# Altium PCB PCI short card universal - 32 BIT.PCBDOC (part 3 of 4)
Units mm, origin at the board's own origin, x right, y up, seen from the top; angles counter-clockwise.
Board outline 174.62 x 106.68 mm, 4 copper layers (TopLayer, MidLayer2, MidLayer3, BottomLayer); 200 components, 306 nets, 1120 pads, 510 vias.
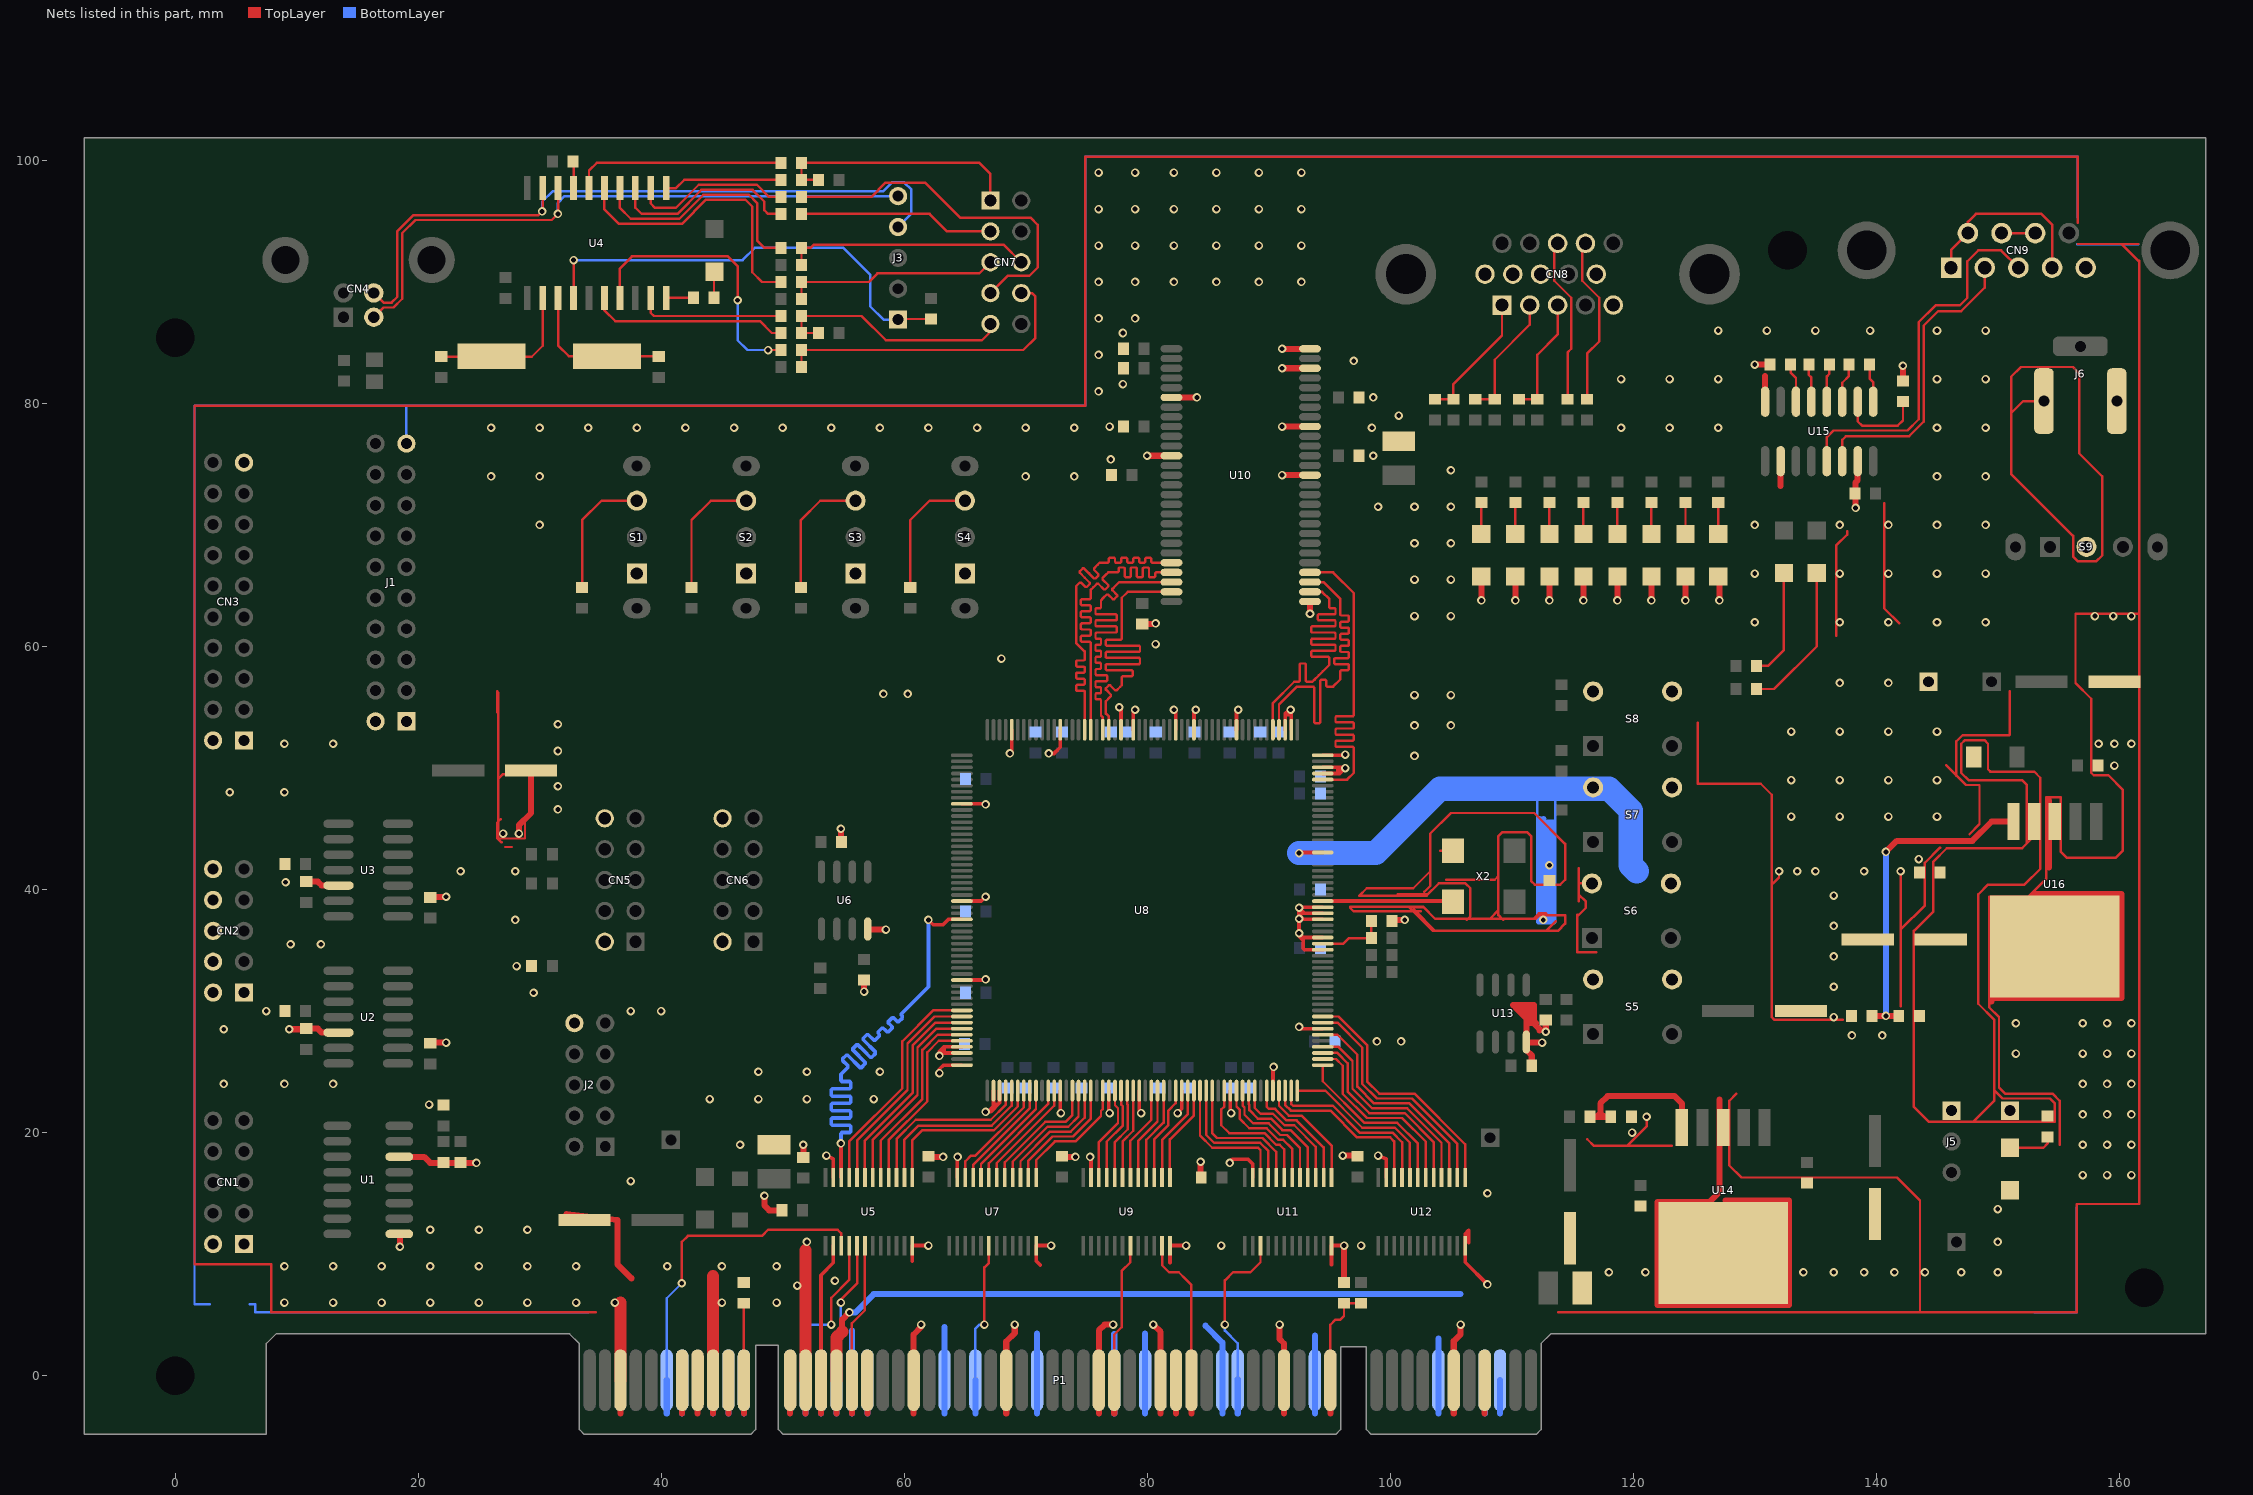
[diagram p5: the nets of this part, all layers, seen from the top]

## Via types
v1: diameter 0.7, hole 0.4, TopLayer to BottomLayer, 476 vias
v2: diameter 0.8, hole 0.5, TopLayer to BottomLayer, 34 vias

## Nets (pads, with @x,y where several pads share a name; then routed paths per layer and width w, separated by ;. In a path a pad name is that pad's centre, name@x,y a point inside that pad or via, vN(x,y) a via of type N, cw(c..) or ccw(c..) an arc to the next point about the centre after c; other vN are vias at no path point) (continued)
GND: C1.1 C2.1 C3.1 C4.1 C7.1 C8.1 C9.1 C10.1 C11.1 C12.2 C17.1 C18.1 C19.1 C20.1 C21.1 C22.1 C23.1 C24.1 C25.1 C26.1 C27.1 C28.1 C29.1 C30.1 C31.2 C32.1 C33.1 C34.1 C35.1 C36.2 C37.1 C38.1 C40.2 C41.2 C43.1 C44.1 C45.1 C46.2 C47.1 C48.1 C49.1 C50.1 C51.1 C52.1 C53.1 C54.1 C55.1 C56.1 C57.1 C58.1 C59.1 C60.1 C61.1 C62.1 C63.1 C64.1 C65.1 C66.1 C67.1 C68.1 C69.1 C70.1 C71.1 C72.1 C73.1 C74.1 C75.2 C76.1 C77.1 CN1.1 CN1.2 CN2.1 CN2.2 CN2.4 CN2.6 CN2.8 CN2.10 CN3.1 CN3.2 CN3.19 CN5.2 CN5.10 CN6.2 CN6.10 CN8.5 CN8.6 CN8.7 CN8.8 CN8.10 CN9.5 J1.1 J1.2 J1.19 J2.10 J6.2 LED2.2 LED3.2 LED4.2 LED5.2 LED6.2 LED7.2 LED8.2 LED9.2 LED12.2 P1.A18 P1.A24 P1.A30 P1.A35 P1.A37 P1.A42 P1.A48 P1.A56 P1.B3 P1.B9 P1.B15 P1.B17 P1.B22 P1.B28 P1.B34 P1.B38 P1.B46 P1.B57 R1.2 R23.2 R26.2 R31.2 R49.2 R56.2 R59.2 R60.2 S1.1 S2.1 S3.1 S4.1 S5.3 S5.4 S6.3 S6.4 S7.3 S7.4 S8.3 S8.4 TP3.1 U1.9 U1.14 U2.12 U3.12 U5.12 U5.23 U6.4 U7.12 U7.23 U8.9 U8.25 U8.38 U8.49 U8.50 U8.52 U8.54 U8.55 U8.65 U8.73 U8.78 U8.85 U8.93 U8.100 U8.111 U8.124 U8.126 U8.129 U8.130 U8.131 U8.140 U8.153 U8.154 U8.156 U8.158 U8.159 U8.167 U8.174 U8.177 U8.184 U8.186 U8.196 U8.204 U9.12 U9.23 U10.6 U10.12 U10.28 U10.41 U10.46 U10.52 U10.54 U11.12 U11.23 U12.12 U12.23 U13.4 U14.3 U14.6 U15.8 U15.10 U15.15 U16.3 U16.6 X2.2 | length 1665.3
  TopLayer w0.2: 26.5,56.3 26.5,54.606 26.6,54.506 ; 26.6,49.1 27,49.5 C12.2@28.2,49.5 ; 26.6,56.2 26.6,44.2 28.8,44.2 28.8,45.6 ; 26.8,45.8 26.5,45.5 26.5,44.234 26.834,43.9 26.9,43.9 ; 27.178,43.5 27.7,43.5 ; 34.628,5.228 7.9,5.228 7.9,9.174 1.6,9.174 1.6,79.809 74.9,79.809 74.9,100.309 156.6,100.309 ; 100.6,39.6 103.1,39.6 ; 101.95,38.35 103.7,36.6 ; 102.5,38.2 97,38.2 96.7,38.5 96.7,38.6 102.7,38.6 102.972,38.328 ; 102.8,39.8 103.3,40.3 103.3,44.6 105,46.3 111.85,46.3 114.4,43.75 114.4,40.8 114,40.4 111.9,40.4 111.6,40.7 111.6,44.4 111.3,44.7 109.2,44.7 108.9,44.4 108.9,37.9 109.3,37.5 ; 103.3,41.5 101.9,40.1 98.066,40.1 97.466,39.5 103,39.5 104,40.5 106.2,40.5 106.6,40.1 106.6,37.8 106.3,37.5 ; 104.1,43.2 X2.2@105.16,43.2 X2.2@105.16,42.66 ; 104.6,40.8 108.6,40.8 108.9,41.1 ; 108.2,37.6 108.9,38.3 ; 111.8,37.6 112.239,38.039 112.793,38.039 112.933,37.9 ; 112.833,36.6 113.617,37.384 ; 113.828,5.228 143.6,5.228 ; 115.4,37.8 116.1,38.5 116.1,39 115.5,39.6 ; 115.5,39.012 115.5,41.734 ; 115.5,40.5 S6.3@116.6,40.5 ; 115.523,37.923 115.4,37.923 115.4,34.853 116.947,34.853 ; 116.213,19.453 116.766,18.9 123.192,18.9 ; 119.5,18.9 121.1,20.5 v1(121.1,21.3) ; 125.3,53.734 125.3,48.7 130.5,48.7 131.4,47.8 131.4,29.5 131.6,29.3 137.25,29.3 ; 128.5,23.2 127.9,22.6 127.9,17.3 128.9,16.3 141.7,16.3 143.6,14.4 143.6,5.228 ; 131.5,40.5 132,41 v1(132,41.5) ; 136.7,60.9 136.7,68.3 137.6,69.2 137.6,69.5 ; 140.65,71.8 140.65,63.15 141.9,61.9 ; 142,30.4 v1(142,41.5) ; 142,36.7 144,38.7 144,42.2 145.25,43.45 ; 145.741,50.24 147.381,48.6 148.5,48.6 148.5,45.378 147.672,44.55 ; 146.6,49.381 146.6,52.2 147.1,52.7 150.934,52.7 151,52.766 151,56.3 ; U16.6@151.9,38.9 152,38.9 154,40.9 154,47.6 155.2,47.6 155.2,43.1 155.7,42.6 159.7,42.6 160.3,43.2 160.3,48.2 159.1,49.4 157.9,49.4 157.7,49.6 157.7,55.7 156.4,57 156.4,62.7 161.65,62.7 ; U16.6@152.4,39.4 149.3,39.4 149.3,30.3 150.1,29.5 150.1,23.7 150.6,23.2 154.5,23.2 155.1,22.6 155.1,19 ; 156.567,93.123 161.567,93.123 ; 156.6,94.89 156.6,100.272 ; 160.177,93.123 161.541,91.759 161.65,91.759 161.65,14.118 156.507,14.118 156.507,5.228 143.6,5.228 ; 101.55,38.55 103.5,36.6 113.8,36.6 114.4,37.2 114.4,37.9 112.3,37.9 112,37.6 103.7,37.6 102.75,38.55 101.55,38.55
  TopLayer w0.3: v1(53.6,18.1) 54.15,17.85 ; U5.23@54.175,16.3 54.175,17.825 ; 60.675,9.4 U5.12@60.675,10.7 v1(62,10.7) ; v1(62.9,24.9) 62.9,25.2 63.25,25.55 U8.52@64.75,25.55 ; v1@62.9,26.55 63.4,27.05 ; 63.3,26.95 63.3,26.7 63.45,26.55 ; U7.23@64.375,16.3 64.375,17.725 v1(64.4,18) ; U8.50@64.75,26.55 63.15,26.55 v1(62.9,26.3) 62.9,26.7 63.25,27.05 U8.49@64.75,27.05 ; U8.38@64.75,32.55 66.65,32.55 v1(66.7,32.6) ; U8.25@64.75,39.05 66.35,39.05 v1(66.7,39.4) ; U8.9@64.75,47.05 66.65,47.05 v1(66.7,47) ; v1(66.7,21.7) 67.1,21.7 67.85,22.45 U8.55@67.85,23.45 ; v1@66.9,21.7 67.35,22.15 U8.54@67.35,23.45 ; 67.37,22.32 67.72,22.32 ; v1@68.716,51.216 68.85,51.35 U8.204@68.85,53.15 ; 71.2,9.102 70.875,9.427 U7.12@70.875,10.7 v1(72.1,10.7) ; v1(71.9,51.2) 72.332,51.2 72.85,51.718 U8.196@72.85,53.15 ; U8.65@72.85,23.45 72.85,21.65 v1(72.9,21.6) ; v1(75.3,18) 75.375,17.825 U9.23@75.375,16.3 ; U8.73@76.85,23.45 76.85,21.65 v1(76.9,21.6) ; v1(77.7,55) 77.85,54.85 U8.186@77.85,53.15 ; U8.184@78.85,53.15 78.85,54.65 v1(79,54.8) ; U8.78@79.35,23.45 79.35,21.75 v1(79.5,21.6) ; 81.875,9.275 U9.12@81.875,10.7 v1(83.2,10.7) ; v1(82.2,54.8) 82.35,54.65 U8.177@82.35,53.15 ; v1(82.5,21.6) 82.85,21.95 U8.85@82.85,23.45 ; U8.174@83.85,53.15 83.85,54.65 v1(84,54.8) ; v1(86.8,17.5) 87,17.8 88.3,17.8 88.675,17.425 U11.23@88.675,16.3 ; v1@86.85,21.65 U8.93@86.85,23.45 ; U8.167@87.35,53.15 87.35,54.65 v1(87.5,54.8) ; U8.100@90.35,23.45 90.35,25.35 v1(90.4,25.4) ; U8.159@91.35,53.15 91.35,54.45 91.7,54.8 v1(91.8,54.8) ; 91.35,54.3 91.45,54.4 91.7,54.4 91.85,54.25 ; U8.158@91.85,53.15 v1@91.85,54.75 ; v1(92.5,28.7) 92.65,28.55 U8.111@94.45,28.55 ; v1(92.5,36.4) 92.85,36.05 ; v1@92.5,37.3 v1@92.75,37.55 ; v1(92.5,37.6) 92.55,37.55 U8.129@94.45,37.55 ; v1@92.5,37.8 92.75,38.05 U8.130@94.45,38.05 ; v1(92.5,38.5) 92.95,38.05 ; v1@92.5,38.6 92.5,36.15 92.85,35.8 ; v1(92.5,43) 92.55,43.05 U8.140@94.45,43.05 ; v1@92.55,38.55 U8.131@94.45,38.55 ; v1@92.556,37.856 92.862,37.55 ; U8.124@94.45,35.05 92.95,35.05 92.85,35.15 92.85,36.05 ; U8.126@94.45,36.05 92.85,36.05 ; U8.153@94.45,49.55 95.85,49.55 v1(96.3,50) ; U8.154@94.45,50.05 96.25,50.05 v1(96.3,50) ; U8.156@94.45,51.05 96.25,51.05 v1(96.3,51.1) ; 95.175,9.125 U11.12@95.175,10.7 v1(96.2,10.7) ; 95.6,49.55 96.05,50 v1(96.3,50) ; 95.65,50.05 95.7,50 95.7,49.65 ; v1(99,18.1) 99.65,17.85 ; U12.23@99.675,16.3 99.675,17.825 ; 106.453,10.947 106.453,11.95 106.175,11.672 106.175,9.325 v1(108,7.5)
  TopLayer w0.5: v1(9.4,28.5) C1.1@10.75,28.5 ; C1.1@10.8,28.55 11.75,28.55 12.07,28.23 U2.12@13.45,28.23 ; C3.1@10.8,40.65 11.75,40.65 12.07,40.33 U3.12@13.45,40.33 ; U1.14@18.45,18.005 20.495,18.005 21,17.5 v1(24.8,17.5) ; v1(18.5,10.6) U1.9@18.5,11.605 ; C7.1@21.05,27.4 v1(22.3,27.4) ; C8.1@21.05,39.4 v1(22.3,39.4) ; v1(28.3,44.6) 28.3,45.3 29.3,46.3 C12.2@29.3,49.8 ; C75.2@32.2,13.3 36.407,12.8 36.407,9.155 37.55,8.012 ; 36.652,-3.131 P1.B3@36.652,-0.381 ; 44.272,-3.131 P1.B9@44.272,-0.381 ; v1(48.5,14.8) 48.5,14 48.9,13.6 R60.2@49.95,13.6 ; C17.1@51.7,17.95 v1(51.7,19) ; 51.892,-3.131 P1.B15@51.892,-0.381 ; 54.432,-3.131 P1.B17@54.432,-0.381 ; C18.1@54.8,43.95 v1(54.8,45) ; 54.902,3.602 54.902,4.602 v1(55.5,5.2) ; v1(56.7,31.6) R23.2@56.7,32.55 ; U6.4@57.055,36.7 v1(58.5,36.7) ; 60.782,-3.131 60.782,3.382 61.4,4 v1(61.4,4.2) ; C19.1@62.05,18 v1(63.2,18) ; 68.402,-3.131 68.402,2.802 69.1,3.5 v1(69.1,4.2) ; C20.1@73.05,18 v1(74.1,18) ; 76.022,-3.131 76.022,3.722 76.5,4.2 v1(77.2,4.2) ; C23.1@79.6,61.85 80.65,61.85 v1(80.7,61.9) ; v1(80,75.7) U10.12@82,75.7 ; v1(80.5,4.2) 81.102,3.598 81.102,-3.131 ; U10.6@82,80.5 v1(84.1,80.5) ; C26.1@84.4,16.35 v1(84.4,17.6) ; v1(90.9,4.2) 90.9,3 91.262,2.638 91.262,-3.131 ; v1(91.1,74.1) U10.41@93.4,74.1 ; v1(91.1,78.1) U10.46@93.4,78.1 ; v1(91.1,82.9) U10.52@93.4,82.9 ; v1(91.1,84.5) U10.54@93.4,84.5 ; v1(93.4,62.7) U10.28@93.4,63.7 ; v1(96.1,18.1) C27.1@97.25,18.1 ; R26.2@96.2,7.65 v1(96.2,10.7) ; R31.2@100.15,37.4 100.25,37.5 v1(101.2,37.5) ; 105.232,-3.131 105.232,2.832 105.8,3.4 v1(105.8,4.2) ; v1(107.5,63.8) LED2.2@107.5,65.75 ; v1(110.3,63.8) LED3.2@110.3,65.75 ; 111.205,29 112,29 ; U13.4@111.255,27.4 v1(112.5,27.4) ; 111.5,29 111.5,30.1 110.8,30.1 111.4,29.5 111.5,29.5 ; C32.1@111.65,25.5 111.65,26.35 111.205,26.795 111.205,29.395 110.1,30.5 111.834,30.5 111.834,28.966 112.3,28.5 112.3,28.4 ; v1(112.8,28.3) C33.1@112.8,29.3 ; v1(113.1,63.8) LED4.2@113.1,65.75 ; v1(115.9,63.8) LED5.2@115.9,65.75 ; v1(118.7,63.8) LED6.2@118.7,65.75 ; v1(121.5,63.8) LED7.2@121.5,65.75 ; v1(124.3,63.8) LED8.2@124.3,65.75 ; 127.1,22.7 127.1,15.1 126.3,14.3 122,14.3 122,5.8 132.8,5.8 132.8,14.4 127.6,14.4 ; v1(127.1,63.8) LED9.2@127.1,65.75 ; v1(130,83.2) C37.1@131.25,83.2 ; U15.8@130.855,80.15 130.855,82.245 ; 132.125,73.225 U15.10@132.125,75.25 ; v1(138.3,71.4) 138.3,73.5 138.475,73.675 U15.15@138.475,75.25 ; C44.1@142.2,81.85 v1(142.2,83.1) ; 149.5,30.8 149.5,31.033 149.466,31.066 160.166,31.066 160.166,39.626 152.926,39.626 U16.6@152.5,39.2 ; 154.2,41.8 154.2,47.325
  TopLayer w1: P1.B3@36.652,-0.381 36.652,6 ; P1.B9@44.272,-0.381 44.272,8.172 ; P1.B15@51.892,-0.381 51.892,10.308 ; P1.B17@54.432,-0.381 54.432,3.132 54.902,3.602
  BottomLayer w0.2: 2.837,5.863 1.6,5.863 1.6,79.8 74.9,79.8 74.9,100.309 156.57,100.309 156.57,95.28 ; 6.163,5.863 6.607,5.863 6.607,5.228 34,5.228 ; J1.19@19.04,76.7 19.04,79.74 19.1,79.8 ; 112.1,48.3 112.1,37.3 112.181,37.219 113.486,37.219 113.6,37.333 113.6,48 ; v1(113.1,42) 113.6,42 ; 152.993,5.228 156.507,5.228 156.507,13.874 ; 156.537,93.1 161.562,93.1
  BottomLayer w0.5: v1(55.5,5.2) 56,5.2 57.5,6.7 105.8,6.7 ; 55.702,-3.131 55.702,3.698 ; 63.322,-3.131 63.322,3.978 ; 70.942,-3.131 70.942,3.458 ; 77.292,-3.131 77.292,3.408 ; 79.832,-3.131 79.832,3.468 ; 84.8,4.1 86.182,2.718 86.182,-3.131 ; 93.802,-3.131 93.802,3.298 ; 103.962,-3.131 103.962,3.062 ; 112.3,45.8 112.3,37.5 113.4,37.5 113.4,45.5 113,45.5 113,37.7 v1@112.6,37.7 ; 112.6,45.8 v1(112.6,37.5) 113.3,37.5
  BottomLayer w2: v1(92.5,43) 98.8,43 104.1,48.3 118,48.3 119.8,46.5 119.8,42 120.3,41.5
  other v1: 9,6 13,6 17,6 21,6 25,6 29,6 33,6 36.2,6 45,6 49.5,6 51.2,7.4 54.3,7.8 118,8.5 121,8.5 134,8.5 136.5,8.5 139,8.5 141.5,8.5 144,8.5 147,8.5 150,8.5 9,9 13,9 17,9 21,9 25,9 29,9 33,9 40.5,9 45,9 49.5,9 86.1,10.7 97.6,10.7 52,11 150,11 21,12 25,12 29,12 150,13.7 108,15 37.5,16 157,16.5 159,16.5 161,16.5 46.5,19 157,19 159,19 161,19 119.9,20 157,21.5 159,21.5 161,21.5 86.9,21.6 20.9,22.3 44,22.75 48,22.75 52,22.75 57.5,22.75 4,24 9,24 13,24 157,24 159,24 161,24 48,25 52,25 58,25 151.5,26.5 157,26.5 159,26.5 161,26.5 98.9,27.5 100.9,27.5 138,28 140.5,28 4,28.5 151.5,29 157,29 159,29 161,29 136.5,29.5 7.5,30 37.5,30 40,30 29.5,31.5 136.5,32 28.1,33.7 136.5,34.5 9.5,35.5 12,35.5 136.5,37 28,37.5 136.5,39.5 9.1,40.6 23.5,41.5 28,41.5 133.5,41.5 135,41.5 139,41.5 143.5,42.5 27,44.6 133,46 137,46 141,46 145,46 31.5,46.6 4.5,48 9,48 31.5,48.5 133,49 137,49 141,49 145,49 159.6,50.2 102,51 68.7,51.2 31.5,51.4 9,52 13,52 158.3,52 159.6,52 161,52 133,53 137,53 141,53 145,53 102,53.5 105,53.5 31.5,53.6 102,56 105,56 58.3,56.1 60.3,56.1 137,57 141,57 68,59 80.7,60.2 130,62 137,62 141,62 145,62 149,62 102,62.5 105,62.5 158,62.5 159.5,62.5 161,62.5 102,65.5 105,65.5 130,66 137,66 141,66 145,66 149,66 102,68.5 105,68.5 30,70 130,70 137,70 141,70 145,70 149,70 99,71.5 102,71.5 105,71.5 26,74 30,74 70,74 74,74 145,74 149,74 105,74.5 77,75.4 98.6,75.7 26,78 30,78 34,78 38,78 42,78 46,78 50,78 54,78 58,78 62,78 66,78 70,78 74,78 98.5,78 119,78 123,78 127,78 145,78 149,78 76.9,78.1 100.7,79 98.6,80.5 76,81 78,81.6 119,82 123,82 127,82 145,82 149,82 97,83.5 76,84 78,85.8 127,86 131,86 135,86 139.5,86 145,86 149,86 76,87 79,87 76,90 79,90 82.2,90 85.7,90 89.2,90 92.7,90 76,93 79,93 82.2,93 85.7,93 89.2,93 92.7,93 76,96 79,96 82.2,96 85.7,96 89.2,96 92.7,96 76,99 79,99 82.2,99 85.7,99 89.2,99 92.7,99
GNT#: P1.A17 U5.5 | length 14.5
  TopLayer w0.2: v1(54.8,6) 54.8,6.267 56.125,7.592 U5.5@56.125,10.7
  BottomLayer w0.2: P1.A17@54.432,-0.381 54.432,3.632 54.8,4 v1(54.8,6)
  BottomLayer w0.5: 54.432,-3.131 P1.A17@54.432,-0.381
IDSEL: P1.A26 U7.6 | length 14.5
  TopLayer w0.2: v1(66.6,4.2) 66.6,8.9 66.975,9.275 U7.6@66.975,10.7
  BottomLayer w0.2: P1.A26@65.862,-0.381 65.862,3.862 66.2,4.2 v1(66.6,4.2)
  BottomLayer w0.5: 65.862,-3.131 P1.A26@65.862,-0.381
INTA#: P1.A6 U5.3 | length 29.3
  TopLayer w0.2: v1(41.7,7.6) 41.7,11 42.2,11.5 48.3,11.5 48.8,12 54.525,12 54.825,11.7 U5.3@54.825,10.7
  BottomLayer w0.2: P1.A6@40.462,-0.381 40.462,6.362 v1(41.7,7.6)
  BottomLayer w0.5: 40.462,-3.131 P1.A6@40.462,-0.381
INTB#: P1.B7 | length 2.8
  TopLayer w0.5: 41.732,-3.131 P1.B7@41.732,-0.381
INTC#: P1.A7 | length 2.8
  BottomLayer w0.5: 41.732,-3.131 P1.A7@41.732,-0.381
INTD#: P1.B8 | length 2.8
  TopLayer w0.5: 43.002,-3.131 P1.B8@43.002,-0.381
IRDY#: P1.B35 U9.7 | length 14.4
  TopLayer w0.2: P1.B35@77.292,-0.381 77.292,3.367 77.9,3.975 77.9,8.6 78.625,9.325 U9.7@78.625,10.7
  TopLayer w0.5: 77.292,-3.131 P1.B35@77.292,-0.381
LAD00: U8.113 U12.13 | length 20.6
  TopLayer w0.2: U8.113@94.45,29.55 95.75,29.55 98.1,27.2 98.1,24.2 99.1,23.2 102,23.2 106.175,19.025 U12.13@106.175,16.3
LAD01: U8.112 U12.14 | length 19.7
  TopLayer w0.2: U8.112@94.45,29.05 95.65,29.05 97.7,27 97.7,24 98.9,22.8 101.781,22.8 105.525,19.056 U12.14@105.525,16.3
LAD02: U8.110 U12.15 | length 18.5
  TopLayer w0.2: U8.110@94.45,28.05 95.65,28.05 97.3,26.4 97.3,23.781 98.681,22.4 101.581,22.4 104.875,19.106 U12.15@104.875,16.3
LAD03: U8.108 U12.16 | length 17.3
  TopLayer w0.2: U8.108@94.45,27.05 95.75,27.05 96.9,25.9 96.9,23.6 98.5,22 101.391,22 104.225,19.166 U12.16@104.225,16.3
LAD04: U8.107 U12.17 | length 16.4
  TopLayer w0.2: U8.107@94.45,26.55 95.65,26.55 96.5,25.7 96.5,23.381 98.281,21.6 101.2,21.6 103.575,19.225 U12.17@103.575,16.3
LAD05: U8.106 U12.18 | length 15.6
  TopLayer w0.2: U8.106@94.45,26.05 95.55,26.05 96.1,25.5 96.1,23.181 98.081,21.2 100.981,21.2 102.925,19.256 U12.18@102.925,16.3
LAD06: U8.105 U12.19 | length 14.1
  TopLayer w0.2: U8.105@94.45,25.55 94.45,24.225 97.875,20.8 100.581,20.8 102.275,19.106 U12.19@102.275,16.3
LAD07: U8.104 U12.20 | length 13.9
  TopLayer w0.2: U8.104@92.35,23.45 94.65,23.45 97.7,20.4 100.381,20.4 101.625,19.156 U12.20@101.625,16.3
LAD08: U8.102 U12.22 | length 14.4
  TopLayer w0.2: U8.102@91.35,23.45 91.35,22.281 91.831,21.8 95.081,21.8 97.281,19.6 100,19.6 100.325,19.275 U12.22@100.325,16.3
LAD09: U8.101 U11.13 | length 9.6
  TopLayer w0.2: U8.101@90.85,23.45 90.85,22.206 91.656,21.4 92.7,21.4 95.175,18.925 U11.13@95.175,16.3
LAD10: U8.99 U11.14 | length 9.9
  TopLayer w0.2: U8.99@89.85,23.45 89.85,22.1 90,21.95 90.531,21.95 91.481,21 92.3,21 94.525,18.775 U11.14@94.525,16.3
LAD11: U8.97 U11.15 | length 10.3
  TopLayer w0.2: U8.97@88.85,23.45 88.85,22.025 89.326,21.549 90.357,21.549 91.307,20.599 92.101,20.599 93.875,18.825 U11.15@93.875,16.3
LAD12: U8.96 U11.16 | length 10.2
  TopLayer w0.2: U8.96@88.35,23.45 88.35,22.331 88.407,22.274 88.407,21.843 89.101,21.149 90.182,21.149 91.132,20.199 91.801,20.199 93.225,18.775 U11.16@93.225,16.3
LAD13: U8.95 U11.17 | length 10.2
  TopLayer w0.2: U8.95@87.85,23.45 87.85,22.231 88.007,22.074 88.007,21.468 88.726,20.749 90.007,20.749 90.957,19.799 91.501,19.799 92.575,18.725 U11.17@92.575,16.3
LAD14: U8.94 U11.18 | length 10.1
  TopLayer w0.2: U8.94@87.35,23.45 87.35,22.15 87.607,21.893 87.607,21.143 88.401,20.349 89.832,20.349 90.782,19.399 91.201,19.399 91.925,18.675 U11.18@91.925,16.3
LAD15: U8.92 U11.19 | length 11.3
  TopLayer w0.2: U8.92@86.35,23.45 86.35,22.15 86.1,21.9 86.1,20.6 86.751,19.949 89.657,19.949 90.607,18.999 90.901,18.999 91.275,18.625 U11.19@91.275,16.3
LAD16: U8.76 U9.20 | length 7.6
  TopLayer w0.2: U9.20@77.325,16.3 77.325,19.192 78.4,20.267 78.4,22.309 78.35,22.359 U8.76@78.35,23.45
LAD17: U8.75 U9.21 | length 7.8
  TopLayer w0.2: U9.21@76.675,16.3 76.675,19.259 78,20.583 78,22.166 77.85,22.316 U8.75@77.85,23.45
LAD18: U8.74 U9.22 | length 7.9
  TopLayer w0.2: U9.22@76.025,16.3 76.025,19.225 77.6,20.8 77.6,22 77.35,22.25 U8.74@77.35,23.45
LAD19: U7.13 U8.72 | length 10.4
  TopLayer w0.2: U7.13@70.875,16.3 70.875,17.742 72.407,19.274 74.107,19.274 76.2,21.367 76.2,21.796 76.35,21.946 U8.72@76.35,23.45
LAD20: U7.14 U8.70 | length 10.3
  TopLayer w0.2: U7.14@70.225,16.3 70.225,17.692 72.207,19.674 73.907,19.674 75.35,21.117 U8.70@75.35,23.45
LAD21: U7.15 U8.69 | length 10.3
  TopLayer w0.2: U7.15@69.575,16.3 69.575,17.642 72.007,20.074 73.707,20.074 74.85,21.217 U8.69@74.85,23.45
LAD22: U7.16 U8.68 | length 10.4
  TopLayer w0.2: U7.16@68.925,16.3 68.925,17.592 71.807,20.474 73.507,20.474 74.35,21.317 U8.68@74.35,23.45
LAD23: U7.17 U8.67 | length 10.4
  TopLayer w0.2: U7.17@68.275,16.3 68.275,17.542 71.607,20.874 73.274,20.874 73.85,21.45 U8.67@73.85,23.45
LAD24: U7.20 U8.61 | length 9
  TopLayer w0.2: U7.20@66.325,16.3 66.325,17.425 70.85,21.95 U8.61@70.85,23.45
LAD25: U7.21 U8.60 | length 9.1
  TopLayer w0.2: U7.21@65.675,16.3 65.675,17.341 70.35,22.016 U8.60@70.35,23.45
LAD26: U7.22 U8.59 | length 9.4
  TopLayer w0.2: U7.22@65.025,16.3 65.025,17.625 65.5,18.1 65.869,18.1 69.85,22.081 U8.59@69.85,23.45
LAD27: U5.13 U8.58 | length 14.2
  TopLayer w0.2: U5.13@60.675,16.3 60.675,19.375 61.474,20.174 67.377,20.174 69.35,22.147 U8.58@69.35,23.45
LAD28: U5.14 U8.57 | length 14.3
  TopLayer w0.2: U5.14@60.025,16.3 60.025,19.425 61.174,20.574 67.211,20.574 68.85,22.213 U8.57@68.85,23.45
LAD29: U5.15 U8.56 | length 14.5
  TopLayer w0.2: U5.15@59.375,16.3 59.375,19.475 60.95,21.05 67.122,21.05 68.35,22.278 U8.56@68.35,23.45
LAD30: U5.16 U8.48 | length 14.9
  TopLayer w0.2: U5.16@58.725,16.3 58.725,19.392 61.9,22.567 61.9,26.6 62.85,27.55 U8.48@64.75,27.55
LAD31: U5.17 U8.47 | length 15.7
  TopLayer w0.2: U5.17@58.075,16.3 58.075,19.342 61.5,22.767 61.5,26.8 62.75,28.05 U8.47@64.75,28.05
LC/BE#0: U8.103 U12.21 | length 14.4
  TopLayer w0.2: U8.103@91.85,23.45 91.85,22.35 92,22.2 95.281,22.2 97.481,20 100.181,20 100.975,19.206 U12.21@100.975,16.3
LC/BE#1: U8.90 U11.20 | length 11.5
  TopLayer w0.2: U8.90@85.35,23.45 85.35,19.95 85.751,19.549 89.482,19.549 90.625,18.406 U11.20@90.625,16.3
LC/BE#2: U8.77 U9.19 | length 7.5
  TopLayer w0.2: U9.19@77.975,16.3 77.975,19.275 78.85,20.15 U8.77@78.85,23.45
LC/BE#3: U7.19 U8.63 | length 9.2
  TopLayer w0.2: U7.19@66.975,16.3 66.975,17.475 71.85,22.35 U8.63@71.85,23.45
LDEVSEL#: U8.84 U9.15 | length 7.9
  TopLayer w0.2: U9.15@80.575,16.3 80.575,19.442 81.75,20.617 81.75,21.817 82.35,22.417 U8.84@82.35,23.45
LFRAME#: U8.80 U9.18 | length 7.9
  TopLayer w0.2: U9.18@78.625,16.3 78.625,19.325 80.35,21.05 U8.80@80.35,23.45
LGNT#: U5.19 U8.45 | length 17.3
  TopLayer w0.2: U5.19@56.775,16.3 56.775,19.342 60.7,23.267 60.7,27.167 62.583,29.05 U8.45@64.75,29.05
LIDSEL: U7.18 U8.64 | length 9.1
  TopLayer w0.2: U7.18@67.625,16.3 67.625,17.492 72.35,22.217 U8.64@72.35,23.45
LINTA#: U5.21 U8.43 | length 19
  TopLayer w0.2: U5.21@55.475,16.3 55.475,19.275 59.85,23.65 59.85,27.517 62.383,30.05 U8.43@64.75,30.05
LIRDY#: U8.81 U9.17 | length 7.8
  TopLayer w0.2: U9.17@79.275,16.3 79.275,19.342 80.85,20.917 U8.81@80.85,23.45
LOCK#: P1.B39 | length 2.8
  TopLayer w0.5: 82.372,-3.131 P1.B39@82.372,-0.381
LPAR: U8.89 U11.21 | length 11.5
  TopLayer w0.2: U8.89@84.85,23.45 84.85,19.816 85.517,19.149 89.307,19.149 89.975,18.481 U11.21@89.975,16.3
LPCI_CLK: U5.22 U8.28 | length 47
  TopLayer w0.3: v1(54.8,19.1) 54.8,16.325 U5.22@54.825,16.3 ; v1@62.05,37.55 v1(62,37.5) 62.4,37.1 63.2,37.1 63.65,37.55 U8.28@64.75,37.55
  BottomLayer w0.3: v1(54.8,19.1) 54.8,19.91 54.89,20 55.51,20 55.6,20.09 55.6,20.51 55.51,20.6 54.09,20.6 54,20.69 54,21.11 54.09,21.2 55.51,21.2 55.6,21.29 55.6,21.71 55.51,21.8 54.09,21.8 54,21.89 54,22.31 54.09,22.4 55.51,22.4 55.6,22.49 55.6,22.91 55.51,23 54.09,23 54,23.09 54,23.51 54.09,23.6 55.51,23.6 55.6,23.69 55.6,24.11 55.51,24.2 54.89,24.2 54.8,24.29 54.8,24.8 55.373,25.373 55.373,25.5 54.934,25.938 54.934,26.066 55.231,26.363 55.359,26.363 56.363,25.359 56.49,25.359 56.787,25.656 56.787,25.783 55.783,26.787 55.783,26.914 56.08,27.211 56.207,27.211 56.709,26.709 57.211,26.207 57.339,26.207 57.635,26.504 57.635,26.631 56.631,27.635 56.631,27.763 56.928,28.06 57.056,28.06 57.494,27.621 57.621,27.621 57.948,27.948 57.948,28.076 57.864,28.161 57.864,28.288 58.161,28.585 58.288,28.585 58.436,28.436 58.585,28.288 58.712,28.288 59.009,28.585 59.009,28.712 58.861,28.861 58.712,29.009 58.712,29.136 59.009,29.433 59.136,29.433 59.285,29.285 59.433,29.136 59.561,29.136 59.858,29.433 59.858,29.561 59.773,29.646 59.773,29.773 62,32 v1(62,37.5)
LPERR#: U8.87 U9.13 | length 8
  TopLayer w0.2: U9.13@81.875,16.3 81.875,19.442 83.85,21.417 U8.87@83.85,23.45
LREQ#: U5.18 U8.46 | length 16.5
  TopLayer w0.2: U5.18@57.425,16.3 57.425,19.425 61.1,23.1 61.1,27 62.65,28.55 U8.46@64.75,28.55
LRST#: U5.20 U8.44 | length 18.2
  TopLayer w0.2: U5.20@56.125,16.3 56.125,19.35 60.275,23.5 60.275,27.342 62.483,29.55 U8.44@64.75,29.55
LSERR#: U8.88 U11.22 | length 11.4
  TopLayer w0.2: U8.88@84.35,23.45 84.35,19.75 85.351,18.749 89.132,18.749 89.325,18.556 U11.22@89.325,16.3
LSTOP#: U8.86 U9.14 | length 8
  TopLayer w0.2: U9.14@81.225,16.3 81.225,19.392 83.35,21.517 U8.86@83.35,23.45
LTRDY#: U8.82 U9.16 | length 7.7
  TopLayer w0.2: U9.16@79.925,16.3 79.925,19.392 81.35,20.817 U8.82@81.35,23.45
M66EN: P1.B49 R26.1 R27.2 | length 11.2
  TopLayer w0.2: P1.B49@95.072,-0.381 95.072,4.172 95.5,4.6 95.9,4.6 96.2,4.9 R26.1@96.2,5.95 R27.2@97.6,5.95
  TopLayer w0.5: 95.072,-3.131 P1.B49@95.072,-0.381
MCLR: J3.1 R25.2 U4.4 | length 36.9
  TopLayer w0.2: U4.4@32.795,88.679 v1@32.795,91.795 ; J3.1@59.5,86.9 59.55,86.95 R25.2@62.2,86.95
  BottomLayer w0.2: v1(32.8,91.8) 46.7,91.8 47.7,92.8 55,92.8 57.2,90.6 57.2,88 58.3,86.9 J3.1@59.5,86.9
MSEL1: R30.2 R31.1 U8.125 | length 5.6
  TopLayer w0.2: U8.125@94.45,35.55 96.15,35.55 96.6,36 R30.2@98.45,36 R31.1@98.45,37.4
NetC13_2: C13.2 U4.2 X1.1 | length 12.7
  TopLayer w0.2: C13.2@21.9,83.85 29.35,83.85 30.255,84.755 U4.2@30.255,88.679
NetC15_2: C15.2 U4.17 | length 2.1
  TopLayer w0.2: U4.17@32.795,97.721 C15.2@32.795,99.855
NetC16_2: C16.2 U4.3 X1.2 | length 12.6
  TopLayer w0.2: U4.3@31.525,88.679 31.525,84.775 32.4,83.9 39.75,83.9 C16.2@39.8,83.85
NetC37_2: C37.2 U15.6 | length 3.2
  TopLayer w0.2: C37.2@132.95,83.2 132.95,82.55 133.395,82.105 U15.6@133.395,80.15
NetC39_1: C39.1 U15.5 | length 3.1
  TopLayer w0.2: C39.1@134.45,83.2 134.45,82.35 134.665,82.135 U15.5@134.665,80.15
NetC39_2: C39.2 U15.4 | length 3.1
  TopLayer w0.2: U15.4@135.935,80.15 135.935,82.235 136.15,82.45 C39.2@136.15,83.2
NetC42_1: C42.1 U15.3 | length 3.3
  TopLayer w0.2: U15.3@137.205,80.15 137.205,81.705 137.75,82.25 C42.1@137.75,83.2
NetC42_2: C42.2 U15.1 | length 3.2
  TopLayer w0.2: C42.2@139.45,83.2 139.45,82.05 139.745,81.755 U15.1@139.745,80.15
NetC44_2: C44.2 U15.2 | length 7.2
  TopLayer w0.2: U15.2@138.475,80.15 138.475,78.525 138.826,78.174 141.774,78.174 142.2,78.6 C44.2@142.2,80.15
NetCN8_1: CN8.1 R32.2 R34.2 | length 10.9
  TopLayer w0.2: R32.2@103.7,80.35 R34.2@105.2,80.35 105.2,81.6 109.2,85.6 CN8.1@109.2,88.1
NetCN8_2: CN8.2 R33.2 R35.2 | length 10.5
  TopLayer w0.2: R33.2@107,80.35 R35.2@108.6,80.35 108.6,83.6 111.49,86.49 CN8.2@111.49,88.1
NetCN8_3: CN8.3 R37.2 R38.2 | length 9.9
  TopLayer w0.2: R38.2@110.6,80.35 R37.2@112.1,80.35 112.1,84 113.78,85.68 CN8.3@113.78,88.1
NetCN8_13: CN8.13 R40.2 | length 13.7
  TopLayer w0.2: CN8.13@113.78,93.18 113.5,92.9 113.5,90.1 114.9,88.7 114.9,84.5 114.6,84.2 R40.2@114.6,80.35
NetCN8_14: CN8.14 R44.2 | length 14.1
  TopLayer w0.2: CN8.14@116.07,93.18 115.8,92.91 115.8,90.1 117.2,88.7 117.2,85.1 116.2,84.1 R44.2@116.2,80.35 R44.2@116.3,80.45
NetCN9_1: CN9.1 CN9.4 CN9.6 | length 15.4
  TopLayer w0.2: CN9.1@146.16,91.18 146.16,92.635 CN9.6@147.545,94.02 147.545,94.945 148.2,95.6 153.6,95.6 154.47,94.73 CN9.4@154.47,91.18
NetCN9_2: CN9.2 U15.14 | length 24.9
  TopLayer w0.2: U15.14@137.205,75.25 137.205,77.005 137.5,77.3 142.7,77.3 143.907,78.507 143.907,86.407 145.1,87.6 147,87.6 148.93,89.53 CN9.2@148.93,91.18
NetCN9_3: CN9.3 U15.13 | length 31.1
  TopLayer w0.2: U15.13@135.935,75.25 135.935,77.235 136.474,77.774 142.574,77.774 143.5,78.7 143.5,86.7 144.874,88.074 146.874,88.074 147.5,88.7 147.5,91.7 148.4,92.6 150.28,92.6 CN9.3@151.7,91.18
NetCN9_7: CN9.7 CN9.8 | length 2.8
  TopLayer w0.2: CN9.7@150.315,94.02 CN9.8@153.085,94.02
NetJ6_1: J6.1 S9.2 | length 44.7
  TopLayer w0.2: 151.1,79.2 152.1,80.2 J6.1@153.8,80.2 ; 151.1,74.2 151.1,82.2 151.9,83 156.2,83 156.7,82.5 156.7,75.9 158.6,74 158.6,67.5 158.1,67 156.6,67 156.2,67.4 156.2,69.1 151.1,74.2
NetLED1_1: LED1.1 R6.2 | length 2.2
  TopLayer w0.2: R6.2@44.35,88.7 LED1.1@44.35,90.85
NetLED2_1: LED2.1 R36.2 | length 2.6
  TopLayer w0.2: LED2.1@107.5,69.25 R36.2@107.5,71.85
NetLED3_1: LED3.1 R39.2 | length 2.6
  TopLayer w0.2: LED3.1@110.3,69.25 R39.2@110.3,71.85
NetLED4_1: LED4.1 R47.2 | length 2.6
  TopLayer w0.2: LED4.1@113.1,69.25 R47.2@113.1,71.85
NetLED5_1: LED5.1 R48.2 | length 2.6
  TopLayer w0.2: LED5.1@115.9,69.25 R48.2@115.9,71.85
NetLED6_1: LED6.1 R50.2 | length 2.6
  TopLayer w0.2: LED6.1@118.7,69.25 R50.2@118.7,71.85
NetLED7_1: LED7.1 R51.2 | length 2.6
  TopLayer w0.2: LED7.1@121.5,69.25 R51.2@121.5,71.85
NetLED8_1: LED8.1 R52.2 | length 2.6
  TopLayer w0.2: LED8.1@124.3,69.25 R52.2@124.3,71.85
NetLED9_1: LED9.1 R53.2 | length 2.6
  TopLayer w0.2: LED9.1@127,69.25 R53.2@127,71.85
NetLED10_1: LED10.1 R55.2 | length 9.1
  TopLayer w0.2: R55.2@130.15,58.4 131.1,58.4 132.4,59.7 LED10.1@132.4,66.05
NetLED11_1: LED11.1 R54.2 | length 12.4
  TopLayer w0.2: R54.2@130.15,56.5 131.6,56.5 135.1,60 LED11.1@135.1,66.05
NetLED12_1: LED12.1 R58.2 | length 3.8
  TopLayer w0.2: LED12.1@151,18.75 153.75,18.75 154.1,19.1 R58.2@154.1,19.65
NetR4_2: R4.2 S1.3 | length 10.7
  TopLayer w0.2: R4.2@33.5,64.85 33.5,70.4 35.1,72 S1.3@38,72
NetR5_2: R5.2 S2.3 | length 10.7
  TopLayer w0.2: R5.2@42.5,64.85 42.5,70.4 44.1,72 S2.3@47,72
NetR12_2: R12.2 S3.3 | length 10.7
  TopLayer w0.2: R12.2@51.5,64.85 51.5,70.4 53.1,72 S3.3@56,72
NetR24_2: R24.2 S4.3 | length 10.7
  TopLayer w0.2: R24.2@60.5,64.85 60.5,70.4 62.1,72 S4.3@65,72
NetR45_2: R45.2 R49.1 U14.5 | length 14.8
  TopLayer w0.5: R45.2@116.45,21.3 R49.1@118.15,21.3 117.3,21.3 117.3,22.4 117.9,23 123.4,23 124,22.4 U14.5@124,20.4 ; 117,21.3 117.3,21.6 ; 117.3,22.1 117.3,21.6 ; 117.3,22.2 117.3,21.6 ; 117.6,21.3 117.3,21.6
NetR56_1: R56.1 R57.2 U16.5 | length 27.3
  TopLayer w0.5: R56.1@139.65,29.6 R57.2@141.85,29.6 ; v1(140.8,43.1) 141.7,44 147.9,44 149.5,45.6 U16.5@151.3,45.6
  BottomLayer w0.5: v1(140.8,29.6) 140.8,36.2 v1@140.8,43.2
NetU8_132: U8.132 X2.3 | length 10.6
  TopLayer w0.3: U8.132@94.5,39.05 X2.3@105.1,39.05
PAR: P1.A43 U11.3 | length 16.4
  TopLayer w0.2: v1(86.4,4.2) 86.4,7.834 87.066,8.5 87.4,8.5 88.5,8.5 89.325,9.325 U11.3@89.325,10.7
  BottomLayer w0.2: v1(86.4,4.2) 86.4,3.7 87.452,2.648 P1.A43@87.452,-0.381
  BottomLayer w0.5: 87.452,-3.131 P1.A43@87.452,-0.3
PCI_CLK: P1.B16 U5.2 | length 14.3
  TopLayer w0.3: P1.B16@53.162,-0.381 53.162,8.262 53.2,8.3 54.175,9.275 U5.2@54.175,10.7
  TopLayer w0.5: 53.162,-3.131 P1.B16@53.162,-0.381
PCI_NC1: P1.A9 | length 3
  BottomLayer w0.5: 44.272,-3.131 P1.A9@44.272,-0.1
PCI_NC2: P1.B10 | length 2.8
  TopLayer w0.5: 45.542,-3.131 P1.B10@45.542,-0.381
PCI_NC3: P1.A10 | length 2.8
  BottomLayer w0.5: 45.542,-3.131 P1.A10@45.542,-0.381
PCI_NC4: P1.A11 | length 2.8
  BottomLayer w0.5: 46.812,-3.131 P1.A11@46.812,-0.381
PCI_NC5: P1.B14 | length 2.8
  TopLayer w0.5: 50.622,-3.131 P1.B14@50.622,-0.381
PCI_NC6: P1.A16 | length 2.8
  BottomLayer w0.5: 53.162,-3.131 P1.A16@53.162,-0.381
PCI_NC7: P1.B19 | length 2.8
  TopLayer w0.5: 56.972,-3.131 P1.B19@56.972,-0.381
PCI_NC8: P1.B59 | length 2.8
  TopLayer w0.5: 107.772,-3.131 P1.B59@107.772,-0.381
PCI_NC9: P1.A59 | length 2.9
  BottomLayer w0.5: 107.8,-3.131 P1.A59@107.8,-0.2
PERR#: P1.B40 U9.11 | length 15.3
  TopLayer w0.2: U9.11@81.225,10.7 81.225,9.075 81.8,8.5 82.6,8.5 83.2,7.9 83.642,7.458 P1.B40@83.642,-0.381
  TopLayer w0.5: 83.642,-3.131 P1.B40@83.642,-0.381
PIC_ASDO: CN7.7 R18.1 | length 30.1
  TopLayer w0.2: R18.1@51.55,97 57.3,97 58.474,98.174 61.726,98.174 64.6,95.3 70.4,95.3 71,94.7 71,91.2 70.3,90.5 68.52,90.5 CN7.7@67.1,89.08 CN7.7@67.58,89.08
PIC_D_N: CN4.2 J3.5 U4.18 | length 53.1
  TopLayer w0.2: CN4.2@16.35,87.1 17.15,87.9 17.983,87.9 18.7,88.617 18.7,94.017 19.783,95.1 31,95.1 31.525,95.625 U4.18@31.525,97.721
  BottomLayer w0.2: v1(31.5,95.6) 31.5,96.5 32.06,97.06 33.1,97.06 J3.5@59.5,97.06
PIC_D_P: CN4.3 J3.4 U4.19 | length 58
  TopLayer w0.2: CN4.3@16.35,89.1 17.15,88.3 17.817,88.3 18.3,88.783 18.3,94.183 19.617,95.5 29.9,95.5 30.255,95.855 U4.19@30.255,97.721
  BottomLayer w0.2: v1(30.2,95.8) 30.2,96.6 31.06,97.46 58.26,97.46 59,98.2 60,98.2 60.6,97.6 60.6,95.62 J3.4@59.5,94.52
PIC_NCE: CN7.6 R15.1 R16.1 | length 20.2
  TopLayer w0.2: R15.1@51.55,91.4 R16.1@51.55,92.8 52.3,92.8 52.574,93.074 68.186,93.074 CN7.6@69.64,91.62
PIC_NCS: CN7.8 R7.1 R8.1 | length 25.7
  TopLayer w0.2: R8.1@51.55,83 R7.1@51.55,84.4 69.8,84.4 70.8,85.4 70.8,88.8 70.52,89.08 CN7.8@69.64,89.08
PIC_RB4: R17.2 U4.13 | length 15.8
  TopLayer w0.2: U4.13@37.875,97.721 37.875,96.125 38.4,95.6 41.333,95.6 43.307,97.574 47.526,97.574 48.5,96.6 48.5,95.9 48.8,95.6 R17.2@49.85,95.6
PIC_RB5: R18.2 U4.12 | length 13.3
  TopLayer w0.2: U4.12@39.145,97.721 39.145,96.455 39.5,96.1 41.2,96.1 43.1,98 47.881,98 48.881,97 R18.2@49.85,97
PIC_RB6: R11.2 U4.11 | length 9.7
  TopLayer w0.2: U4.11@40.415,97.721 41.221,97.721 41.9,98.4 R11.2@49.85,98.4
PIC_RB7: R6.1 U4.10 | length 2.2
  TopLayer w0.2: U4.10@40.415,88.679 40.436,88.7 R6.1@42.65,88.7
PIC_RC0: R19.2 U4.16 | length 17.5
  TopLayer w0.2: U4.16@34.065,97.721 34.065,99.165 34.7,99.8 R19.2@49.85,99.8
PIC_RC1: R14.2 U4.15 | length 23.6
  TopLayer w0.2: U4.15@35.335,97.721 35.335,95.965 36.526,94.774 41.707,94.774 43.707,96.774 46.926,96.774 47.5,96.2 47.5,90.8 48.3,90 R14.2@49.85,90
PIC_RC2: R16.2 U4.14 | length 19.7
  TopLayer w0.2: U4.14@36.605,97.721 36.605,96.095 37.5,95.2 41.5,95.2 43.474,97.174 47.226,97.174 47.9,96.5 47.9,93.4 48.5,92.8 R16.2@49.85,92.8
PIC_RC3: R7.2 U4.7 | length 22.8
  TopLayer w0.2: U4.7@36.605,88.679 36.605,91.105 37.6,92.1 45.5,92.1 46.3,91.3 v1(46.3,88.5) ; v1(48.8,84.4) R7.2@49.85,84.4
  BottomLayer w0.2: v1(46.3,88.5) 46.3,85.2 47.1,84.4 v1(48.8,84.4)
PIC_RC4: R9.2 U4.6 | length 16.3
  TopLayer w0.2: U4.6@35.335,88.679 35.335,87.665 36.226,86.774 48.126,86.774 49.1,85.8 R9.2@49.85,85.8
PIC_RC7: R10.2 U4.9 | length 12
  TopLayer w0.2: U4.9@39.145,88.679 39.145,87.455 39.4,87.2 R10.2@49.85,87.2
PIC_TCK: CN7.1 R11.1 R19.1 R22.1 | length 20.9
  TopLayer w0.2: R22.1@52.95,98.4 R11.1@51.55,98.4 R19.1@51.55,99.8 66.2,99.8 67.1,98.9 CN7.1@67.1,96.7
PIC_TDI: CN7.9 R9.1 R10.1 R21.1 | length 20.1
  TopLayer w0.2: R21.1@52.95,85.8 R9.1@51.55,85.8 R10.1@51.55,87.2 56.5,87.2 58.5,85.2 66.4,85.2 67.1,85.9 CN7.9@67.1,86.54
PIC_TDO: CN7.3 R17.1 | length 16.1
  TopLayer w0.2: R17.1@51.55,95.6 62.1,95.6 63.54,94.16 CN7.3@67.1,94.16
PIC_TMS: CN7.5 R13.1 R14.1 | length 17.6
  TopLayer w0.2: R13.1@51.55,88.6 R14.1@51.55,90 57.1,90 57.8,90.7 66.18,90.7 CN7.5@67.1,91.62
PME#: P1.A19 | length 2.8
  BottomLayer w0.5: 56.972,-3.131 P1.A19@56.972,-0.381
POWER_3.3V: C41.1 C45.2 D3.1 J5.1 R57.1 R58.1 TP5.1 U16.4 | length 107.4
  TopLayer w0.2: 146.5,20.9 152.8,20.9 154.7,20.9 154.7,22.4 154.3,22.8 150.4,22.8 149.7,23.5 ; 152.395,43.795 152.395,48.605 152,49 147.6,49 147,49.6 147,52 147.3,52.3 148.9,52.3 149.2,52 149.2,49.9 149.4,49.7 153,49.7 153.5,49.2 153.5,41.7 152.2,40.4 149.2,40.4 148.4,39.6 148.4,30.6 149.7,29.3 149.7,22.6 148,20.9 144.3,20.9 143.1,22.1 143.1,36.6 144.7,38.2 144.7,42.3 145.8,43.4 152,43.4 153,44.4 U16.4@153,45.6
PRSNT2#: P1.B11 R59.1 | length 9.2
  TopLayer w0.2: P1.B11@46.812,-0.381 46.812,5.912 R59.1@46.9,6
  TopLayer w0.5: 46.812,-3.131 P1.B11@46.812,-0.381
REQ64#: P1.A60 | length 2.8
  BottomLayer w0.5: 109.042,-3.131 P1.A60@109.042,-0.381
REQ#: P1.B18 U5.6 | length 14.3
  TopLayer w0.2: P1.B18@55.702,-0.381 55.702,4.302 56.775,5.375 56.775,7.575 U5.6@56.775,10.7
  TopLayer w0.5: 55.702,-3.131 P1.B18@55.702,-0.381
RST#: P1.A15 U5.4 | length 16.2
  TopLayer w0.2: v1@54.007,4.2 54.007,6.407 55.475,7.875 U5.4@55.475,10.7
  BottomLayer w0.2: P1.A15@51.892,-0.1 51.892,3.692 52.4,4.2 v1(54,4.2)
  BottomLayer w0.5: 51.892,-3.131 P1.A15@51.892,-0.1
SDRAM_A0: U8.192 U10.23 | length 30.6
  TopLayer w0.2: U8.192@74.85,53.15 74.85,56.3 74.8,56.35 74.225,56.35 74.15,56.425 74.15,56.775 74.225,56.85 74.775,56.85 74.85,56.925 74.85,57.275 74.775,57.35 74.225,57.35 74.15,57.425 74.15,57.775 74.225,57.85 74.775,57.85 74.85,57.925 74.85,58.275 74.775,58.35 74.225,58.35 74.15,58.425 74.15,58.775 74.225,58.85 74.775,58.85 74.85,58.925 74.85,59.35 74.85,59.6 74.15,60.3 74.15,60.7 74.15,61.2 74.15,61.7 74.15,62.2 74.15,62.7 74.15,63.2 74.15,63.7 74.15,64.2 74.15,64.7 74.15,64.95 74.155,64.955 74.456,65.256 74.562,65.256 74.923,64.895 75.029,64.895 75.277,65.142 75.277,65.248 74.863,65.663 74.448,66.077 74.448,66.183 74.696,66.43 74.802,66.43 75.216,66.016 75.636,65.596 75.742,65.596 75.989,65.844 75.989,65.95 75.623,66.317 75.623,66.423 75.923,66.723 76.1,66.9 76.35,66.9 76.775,66.9 76.85,66.975 76.85,67.225 76.925,67.3 77.275,67.3 77.35,67.225 77.35,66.975 77.425,66.9 77.775,66.9 77.85,66.975 77.85,67.225 77.925,67.3 78.275,67.3 78.35,67.225 78.35,66.975 78.425,66.9 78.775,66.9 78.85,66.975 78.85,67.225 78.925,67.3 79.275,67.3 79.35,67.225 79.35,66.975 79.425,66.9 79.775,66.9 79.85,66.975 79.85,67.225 79.925,67.3 80.275,67.3 80.35,67.225 80.35,66.975 80.425,66.9 80.85,66.9 81.1,66.9 U10.23@82,66.9
SDRAM_A1: U8.191 U10.24 | length 30.1
  TopLayer w0.2: U8.191@75.35,53.15 75.35,59.6 75.35,59.9 75.35,60.325 75.275,60.4 74.625,60.4 74.55,60.475 74.55,60.825 74.625,60.9 75.275,60.9 75.35,60.975 75.35,61.325 75.275,61.4 74.625,61.4 74.55,61.475 74.55,61.825 74.625,61.9 75.275,61.9 75.35,61.975 75.35,62.325 75.275,62.4 74.625,62.4 74.55,62.475 74.55,62.825 74.625,62.9 75.275,62.9 75.35,62.975 75.35,63.325 75.275,63.4 74.625,63.4 74.55,63.475 74.55,63.825 74.625,63.9 75.275,63.9 75.35,63.975 75.35,64.4 75.35,64.65 75.563,64.863 75.863,65.163 75.969,65.163 76.439,64.693 76.545,64.693 76.793,64.941 76.793,65.047 76.323,65.517 76.323,65.623 76.623,65.923 76.8,66.1 77.15,66.1 77.575,66.1 77.65,66.175 77.65,66.425 77.725,66.5 78.075,66.5 78.15,66.425 78.15,66.1 78.15,65.775 78.225,65.7 78.575,65.7 78.65,65.775 78.65,66.1 78.65,66.425 78.725,66.5 79.075,66.5 79.15,66.425 79.15,66.1 79.15,65.775 79.225,65.7 79.575,65.7 79.65,65.775 79.65,66.1 79.65,66.425 79.725,66.5 80.075,66.5 80.15,66.425 80.15,66.1 80.15,65.775 80.225,65.7 80.575,65.7 80.65,65.775 80.65,66.025 80.725,66.1 80.9,66.1 U10.24@82,66.1
SDRAM_A2: U8.189 U10.25 | length 30.4
  TopLayer w0.2: U8.189@76.35,53.15 76.35,54.165 76.2,54.315 76.2,55.4 76.2,55.575 76.125,55.65 75.825,55.65 75.75,55.725 75.75,56.075 75.825,56.15 76.125,56.15 76.2,56.225 76.2,56.575 76.125,56.65 75.825,56.65 75.75,56.725 75.75,57.075 75.825,57.15 76.2,57.15 76.641,57.15 76.716,57.225 76.716,57.575 76.641,57.65 76.2,57.65 75.825,57.65 75.75,57.725 75.75,58.075 75.825,58.15 76.125,58.15 76.2,58.225 76.2,58.575 76.125,58.65 75.825,58.65 75.75,58.725 75.75,59.075 75.825,59.15 76.125,59.15 76.2,59.225 76.2,59.575 76.125,59.65 75.825,59.65 75.75,59.725 75.75,60.075 75.825,60.15 76.125,60.15 76.2,60.225 76.2,60.575 76.125,60.65 75.825,60.65 75.75,60.725 75.75,61.075 75.825,61.15 76.2,61.15 77.432,61.15 77.507,61.225 77.507,61.575 77.432,61.65 76.2,61.65 75.825,61.65 75.75,61.725 75.75,62.075 75.825,62.15 76.2,62.15 77.432,62.15 77.507,62.225 77.507,62.575 77.432,62.65 76.2,62.65 75.825,62.65 75.75,62.725 75.75,63.075 75.825,63.15 76.125,63.15 76.2,63.225 76.2,63.65 76.2,63.8 76.377,63.977 76.677,64.277 76.783,64.277 77.174,63.886 77.28,63.886 77.528,64.134 77.528,64.24 77.137,64.631 77.137,64.737 77.437,65.037 77.7,65.3 77.95,65.3 78.2,65.3 U10.25@82,65.3
SDRAM_A3: U8.188 U10.26 | length 32.1
  TopLayer w0.2: U8.188@76.85,53.15 76.85,54.231 76.6,54.481 76.6,55.5 76.9,55.8 77.024,55.924 77.024,56.03 76.6,56.454 76.6,56.56 76.847,56.807 76.954,56.807 77.377,56.383 77.483,56.383 77.784,56.684 77.907,56.807 77.907,57.057 77.907,57.482 77.982,57.557 78.724,57.557 78.799,57.632 78.799,57.982 78.724,58.057 77.907,58.057 76.675,58.057 76.6,58.132 76.6,58.482 76.675,58.557 77.907,58.557 79.332,58.557 79.407,58.632 79.407,58.982 79.332,59.057 77.907,59.057 76.675,59.057 76.6,59.132 76.6,59.482 76.675,59.557 77.907,59.557 79.332,59.557 79.407,59.632 79.407,59.982 79.332,60.057 77.907,60.057 76.675,60.057 76.6,60.132 76.6,60.482 76.675,60.557 77.832,60.557 77.907,60.632 77.907,60.9 77.907,64.007 78.4,64.5 U10.26@82,64.5
SDRAM_A4: U8.161 U10.29 | length 32.4
  TopLayer w0.2: U8.161@90.35,53.15 90.35,55.35 92.1,57.1 92.3,57.1 92.475,57.1 92.55,57.175 92.55,58.525 92.625,58.6 92.975,58.6 93.05,58.525 93.05,57.175 93.125,57.1 93.55,57.1 93.6,57.1 93.777,57.277 94.13,57.63 94.45,57.95 95,58.5 95,58.9 95,59.075 94.925,59.15 93.575,59.15 93.5,59.225 93.5,59.575 93.575,59.65 95,59.65 95.425,59.65 95.5,59.725 95.5,60.075 95.425,60.15 95,60.15 93.575,60.15 93.5,60.225 93.5,60.575 93.575,60.65 95,60.65 95.425,60.65 95.5,60.725 95.5,61.075 95.425,61.15 95,61.15 93.575,61.15 93.5,61.225 93.5,61.575 93.575,61.65 95,61.65 95.425,61.65 95.5,61.725 95.5,62.075 95.425,62.15 95,62.15 94.113,62.15 94.038,62.225 94.038,62.575 94.113,62.65 95,62.65 95.425,62.65 95.5,62.725 95.5,63.075 95.425,63.15 95.075,63.15 95,63.225 95,63.65 95,63.9 94.4,64.5 U10.29@93.4,64.5
SDRAM_A5: U8.160 U10.30 | length 31.6
  TopLayer w0.2: U8.160@90.85,53.15 90.85,55.217 92.333,56.7 93,56.7 93.25,56.7 93.675,56.7 93.75,56.625 93.75,53.775 93.825,53.7 94.175,53.7 94.25,53.775 94.25,56.7 94.25,57.184 94.325,57.259 94.675,57.259 94.75,57.184 94.75,56.775 94.825,56.7 95.25,56.7 95.3,56.7 95.9,57.3 95.9,57.55 95.9,57.975 95.975,58.05 96.525,58.05 96.6,58.125 96.6,58.475 96.525,58.55 95.9,58.55 95.475,58.55 95.4,58.625 95.4,58.975 95.475,59.05 95.9,59.05 96.525,59.05 96.6,59.125 96.6,59.475 96.525,59.55 95.975,59.55 95.9,59.625 95.9,59.975 95.975,60.05 96.525,60.05 96.6,60.125 96.6,60.475 96.525,60.55 95.975,60.55 95.9,60.625 95.9,60.975 95.975,61.05 96.525,61.05 96.6,61.125 96.6,61.475 96.525,61.55 95.975,61.55 95.9,61.625 95.9,61.975 95.975,62.05 96.525,62.05 96.6,62.125 96.6,62.475 96.525,62.55 95.975,62.55 95.9,62.625 95.9,62.7 95.9,63.9 94.5,65.3 U10.30@93.4,65.3
SDRAM_A6: U8.152 U10.31 | length 30.4
  TopLayer w0.2: U10.31@93.4,66.1 95.3,66.1 97,64.4 97,54.325 96.925,54.25 95.575,54.25 95.5,54.175 95.5,53.825 95.575,53.75 96.925,53.75 97,53.675 97,53.325 96.925,53.25 95.575,53.25 95.5,53.175 95.5,52.825 95.575,52.75 96.925,52.75 97,52.675 97,52.325 96.925,52.25 95.575,52.25 95.5,52.175 95.5,51.825 95.575,51.75 96.925,51.75 97,51.675 97,49.6 96.45,49.05 U8.152@94.45,49.05

## Text inside footprints (layer, text, board x,y; h text height)
CN1: TopOverlay "10" at 2.1,22.1 h1.27; TopOverlay "9" at 5.5,22.1 h1.27; TopOverlay "2" at 1.8,8.6 h1.27; TopOverlay "1" at 7,8.8 h1.27
CN2: TopOverlay "10" at 2,43.2 h1.27; TopOverlay "9" at 5.3,43.2 h1.27; TopOverlay "2" at 2.3,28.8 h1.27; TopOverlay "1" at 5.8,28.8 h1.27
CN3: TopOverlay "20" at 2,76.5 h1.27; TopOverlay "19" at 5.1,76.5 h1.27; TopOverlay "2" at 2.5,49.6 h1.27; TopOverlay "1" at 5.4,49.6 h1.27
CN5: TopOverlay "2" at 34.8,33 h1.27; TopOverlay "1" at 37.8,33 h1.27; TopOverlay "9" at 37.5,47.6 h1.27; TopOverlay "10" at 34.2,47.5 h1.27
CN6: TopOverlay "2" at 44.6,32.9 h1.27; TopOverlay "1" at 47.6,32.9 h1.27; TopOverlay "9" at 47.2,47.6 h1.27; TopOverlay "10" at 44,47.6 h1.27
CN7: TopOverlay "2" at 69.3,98.2 h1.27; TopOverlay "1" at 66.8,98.2 h1.27; TopOverlay "9" at 66.6,83.5 h1.27; TopOverlay "10" at 68.9,83.5 h1.27
CN8: TopOverlay "1" at 106,83.7 h1.5; TopOverlay "15" at 119.36,92.799 h1.5; TopOverlay "5" at 119,83.6 h1.5; TopOverlay "11" at 106.2,92.8 h1.5
CN9: TopOverlay "1" at 145.2,87.7 h1.5; TopOverlay "5" at 157.4,87.7 h1.5; TopOverlay "9" at 155.4,95.8 h1.5; TopOverlay "6" at 146.9,96 h1.5
D1: TopOverlay "K" at 43.4,18.2 h0.8; TopOverlay "A" at 43.4,10.5 h0.8
D2: TopOverlay "K" at 46.2,17.7 h0.8; TopOverlay "A" at 46.2,10.5 h0.8
D3: TopOverlay "A" at 146,50.5 h0.8; TopOverlay "K" at 153.1,50.5 h0.8
J1: TopOverlay "20" at 15.2,78.3 h1.27; TopOverlay "19" at 18.3,78.3 h1.27; TopOverlay "1" at 19.04,50.84 h1.27; TopOverlay "2" at 15.74,50.84 h1.27
J2: TopOverlay "10" at 29,28.3 h1.27; TopOverlay "9" at 37.3,28 h1.27; TopOverlay "1" at 37.3,18.1 h1.27; TopOverlay "2" at 30.3,18.1 h1.27
LED1: TopOverlay "K" at 46,95 h0.8; TopOverlay "A" at 46.1,90 h0.8
LED2: TopOverlay "K" at 106.3,63.2 h0.8; TopOverlay "A" at 105.8,70.8 h0.8
LED3: TopOverlay "K" at 109.1,63.2 h0.8; TopOverlay "A" at 108.7,70.8 h0.8
LED4: TopOverlay "K" at 111.9,63.2 h0.8; TopOverlay "A" at 111.4,70.8 h0.8